# Altium PCB 01.PcbDoc
Units mm, origin at the board's own origin, x right, y up, seen from the top; angles counter-clockwise.
Board outline 90.17 x 91.31 mm, 2 copper layers (Top Layer, Bottom Layer); 65 components, 0 nets, 220 pads, 0 vias.
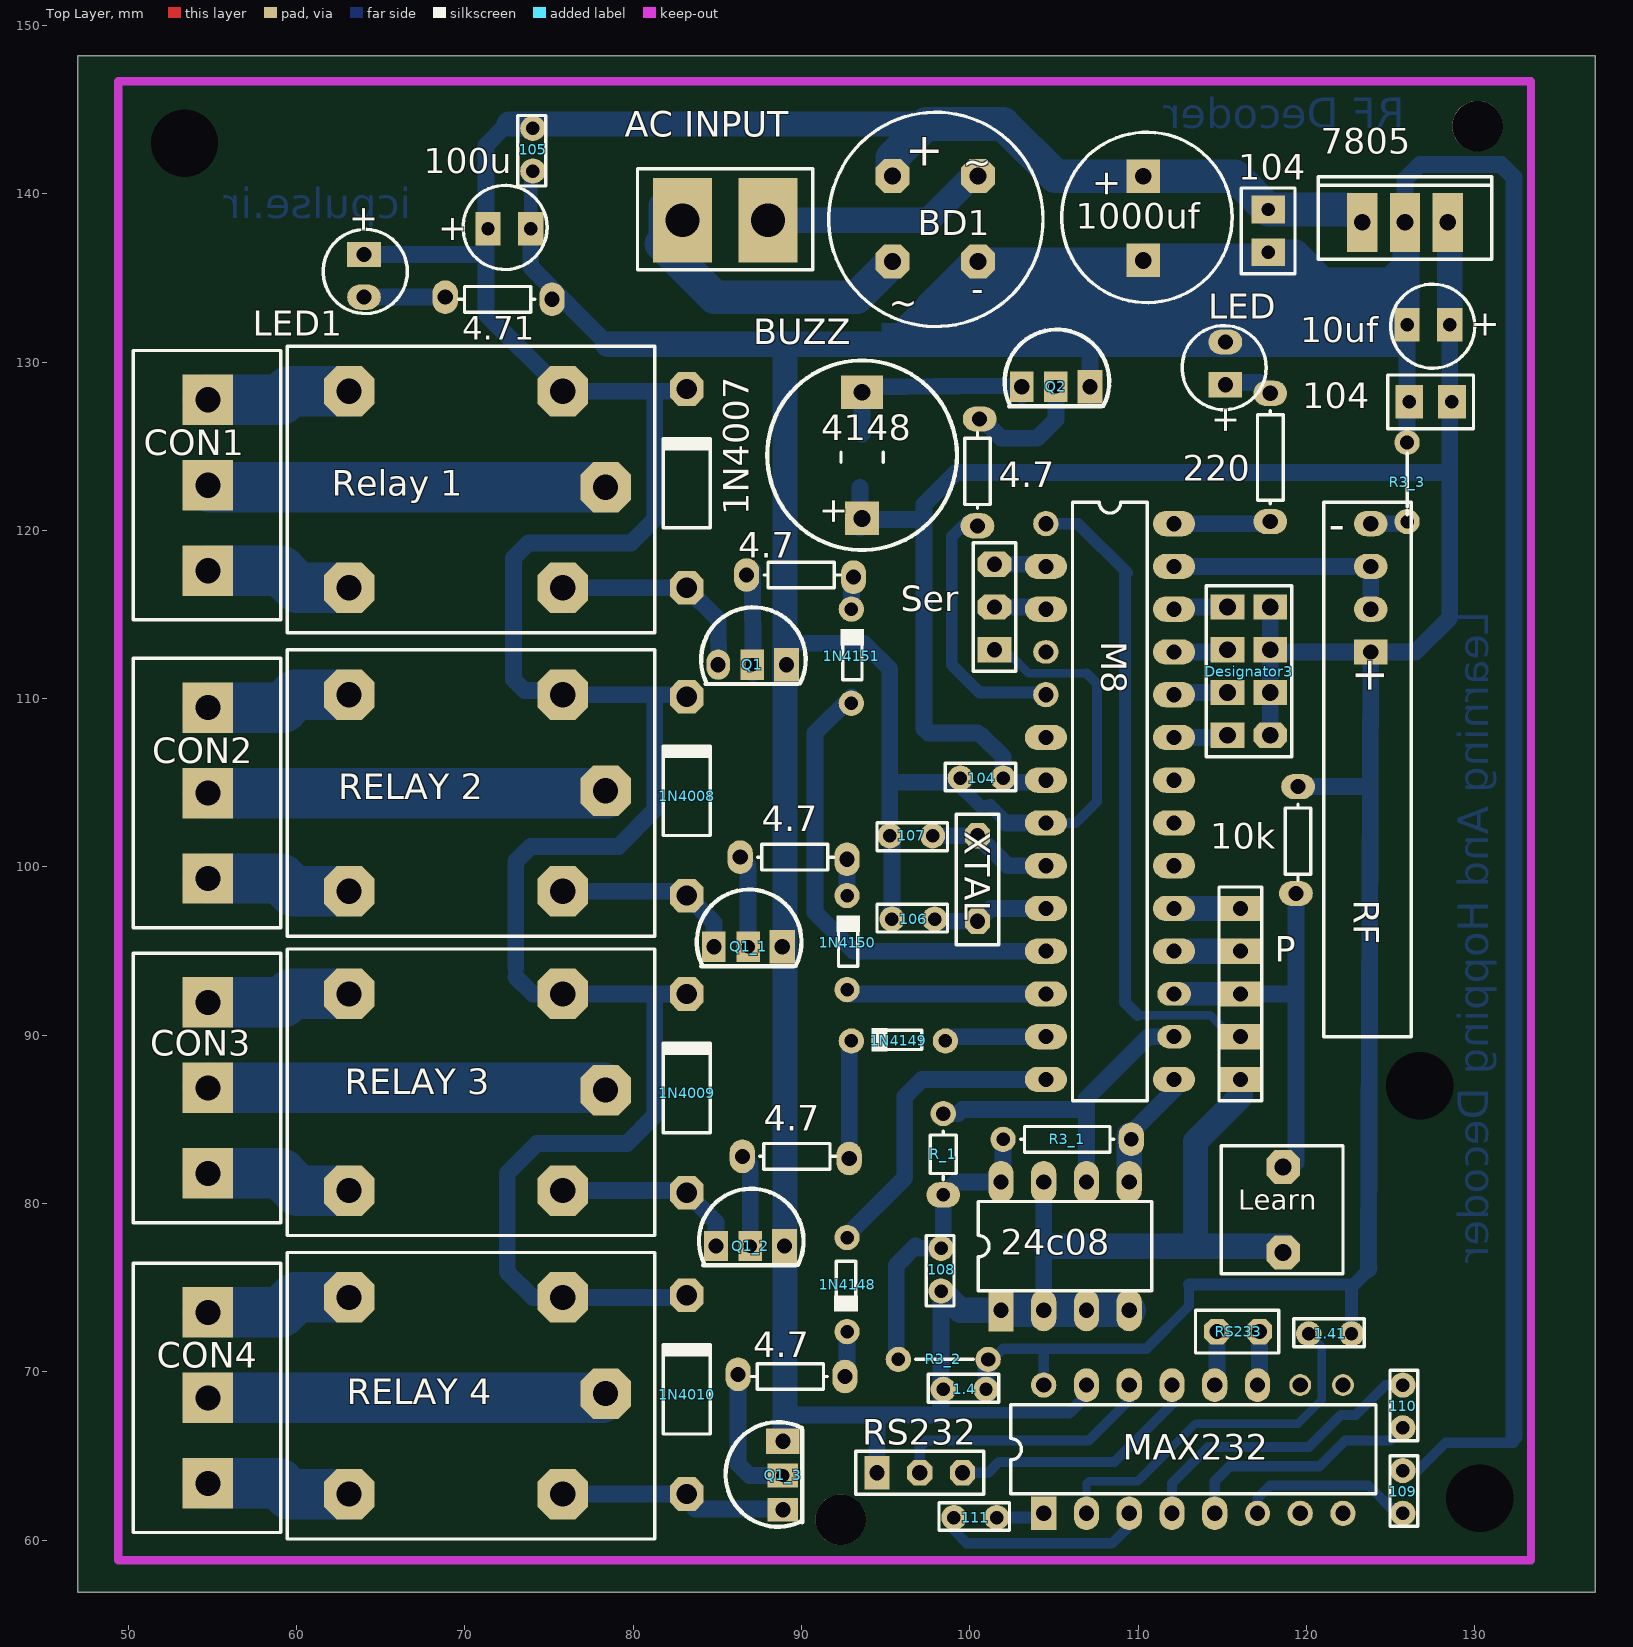
[diagram p0: Top Layer view]
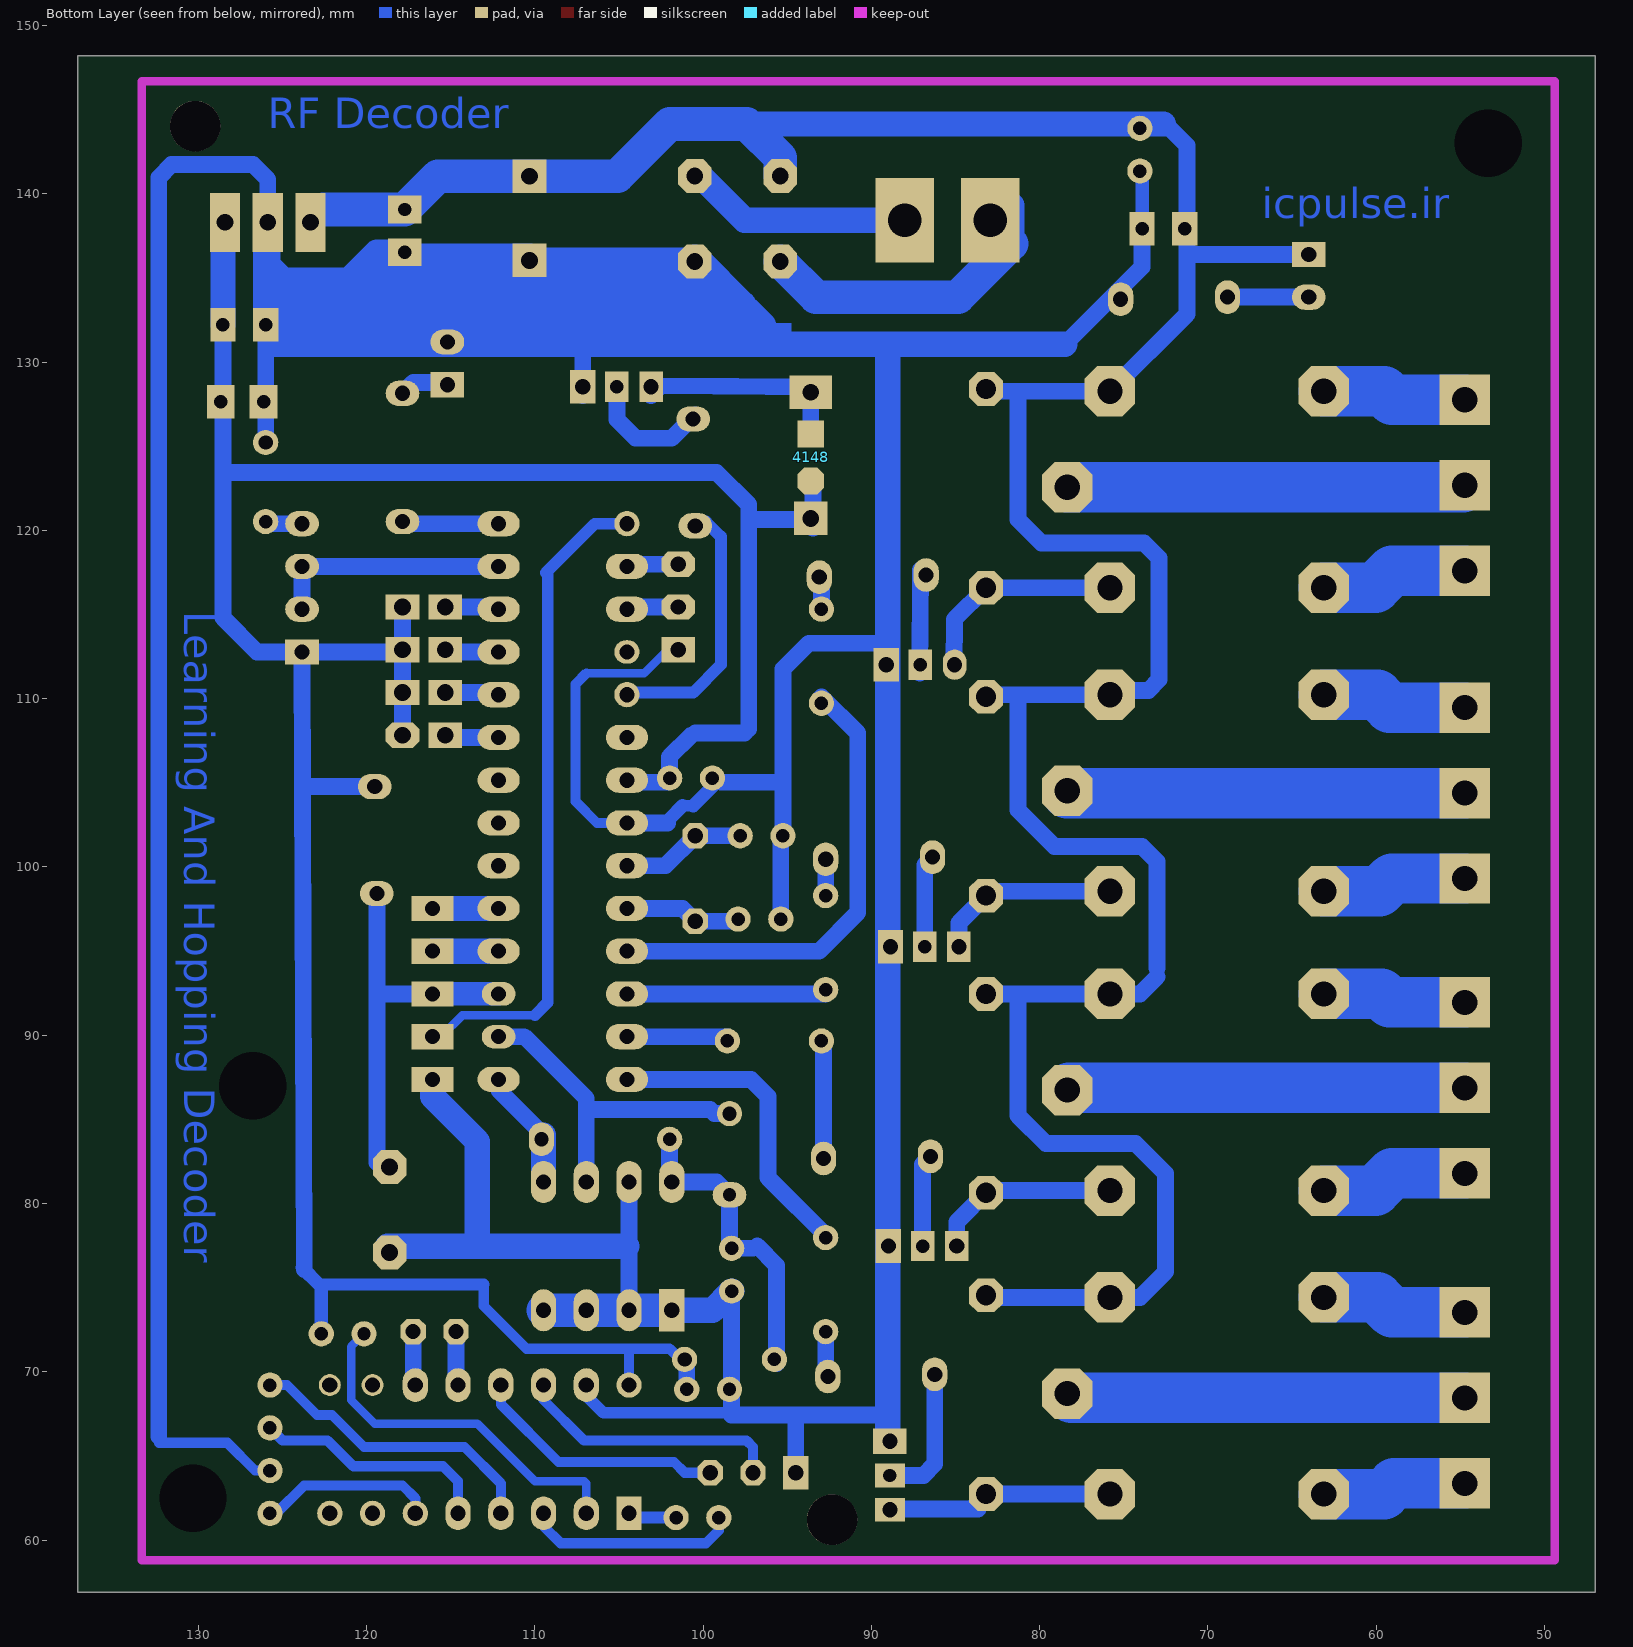
[diagram p1: Bottom Layer view, seen from below]

## Layer stack, top to bottom
Top Solder: solder mask 0.0102, Solder Resist, Dk 3.5
Top Layer: signal copper 0.0356
Dielectric1: dielectric 0.32, FR-4, Dk 4.8
Bottom Layer: signal copper 0.0356
Bottom Solder: solder mask 0.0102, Solder Resist, Dk 3.5

## Board outline
47.498,148.209 137.16,148.209 137.16,56.896 46.99,56.896 46.99,148.209

## Design rules (kind name [scope] priority, off if disabled: settings)
Clearance [All] p1: gap=0.254 ignorepadtopadclearanceinfootprint=FALSE except(0: Arc-Hole Track-Hole SMDPad-Hole THPad-Hole Via-Hole Fill-Hole Poly-Hole Region-Hole Text-Hole)
FabricationTestPointUsage TestPointUsage [All] p1: valid=0 allowmultiple=FALSE
FabricationTestpoint Testpoint [All] p1: side=3 testpointundercomponent=TRUE minsize=1.016 maxsize=2.54 preferedsize=1.524 minholesize=0 maxholesize=1.016 preferedholesize=0.813 testpointgrid=0.025 allowsidetop=TRUE allowsidebottom=TRUE usegrid=TRUE gridtolerance=0
PolygonConnect [All] p1: connectstyle=Relief reliefconductorwidth=0.254 reliefentries=4 polygonreliefangle="90 Angle" airgapwidth=0.254
RoutingVias [All] p1: holewidth=0.711 width=1.27 viastyle="Through Hole" minholewidth=0.711 minwidth=1.27 maxholewidth=0.711 maxwidth=1.27
SolderMaskExpansion [All] p1: expansion=0.102
Width [All] p1: maxlimit=0.254 minlimit=0.254 preferedwidth=0.254
28 further rules are at their usual default settings.

## Components (designator, comment, footprint, x,y, rotation, side; value= is the part's Value field where it differs from the comment)
1.4 "104" VP32-3.2#1 99.695,68.961 r180 top (schematic designator C7)
1.41 "104" VP32-3.2#1 121.412,72.263 r180 top (schematic designator C7)
1N4007 "Comment" DO-41#1 83.185,122.809 r90 top
1N4008 "Comment" DO-41#1 83.185,104.521 r90 top
1N4009 "Comment" DO-41#1 83.185,86.868 r90 top
1N4010 "Comment" DO-41#1 83.185,68.961 r90 top
1N4148 "Comment" DO-41#2 92.71,76.327 r270 top
1N4149 "Comment" DO-41#2 96.901,89.662 r180 top
1N4150 "Comment" DO-41#2 92.71,94.361 r90 top
1N4151 "Comment" DO-41#2 92.964,111.379 r90 top
4.7 "Comment" AXIAL-0.3#1 100.457,124.079 r270 top
4.7 "Comment" AXIAL-0.3#1 88.773,69.723 r0 top
4.7 "Comment" AXIAL-0.3#1 90.297,82.804 r180 top
4.7 "Comment" AXIAL-0.3#1 90.17,100.584 r180 top
4.7 "Comment" AXIAL-0.3#1 90.551,117.348 r180 top
4.71 "Comment" AXIAL-0.3#1 71.374,133.731 r0 top
10k "Comment" AXIAL-0.3#1 119.507,100.965 r90 top
10uf "100uF" cap02#1 118.364,127.127 r270 top (schematic designator C5)
24c08 "Comment" DIP-8 105.664,77.47 r0 top
100u "100uF" cap02#1 81.534,143.002 r90 top (schematic designator C5)
104 "104" VP32-3.2#1 100.711,105.283 r180 top (schematic designator C7)
104 "22pF" VP32-3.2#2 127.381,127.635 r180 top (schematic designator C7)
104 "22pF" VP32-3.2#2 117.729,137.795 r90 top (schematic designator C7)
105 "104" VP32-3.2#1 74.041,142.621 r270 top (schematic designator C7)
106 "104" VP32-3.2#1 96.647,96.901 r180 top (schematic designator C7)
107 "104" VP32-3.2#1 96.52,101.854 r0 top (schematic designator C7)
108 "104" VP32-3.2#1 98.298,76.073 r270 top (schematic designator C7)
109 "104" VP32-3.2#1 125.73,62.865 r90 top (schematic designator C7)
110 "104" VP32-3.2#1 125.73,67.945 r90 top (schematic designator C7)
111 "104" VP32-3.2#1 100.33,61.341 r180 top (schematic designator C7)
220 "Comment" AXIAL-0.3#2 117.856,124.333 r270 top
1000uf "Comment" CAPPR5-5x5 110.311,138.544 r270 top
4148 "Comment" 3225[1210] 93.599,124.333 r90 top
7805 "Comment" TO-262-AA 125.857,138.303 r0 top
"AC INPUT" "Comment" HDR1X2#1 88.011,138.43 r180 top
BUZZ "Buzzer" Buzzer1 101.219,125.73 r90 top
CON1 "Comment" HDR1X3#1 54.737,117.602 r90 top
CON2 "Comment" HDR1X3#1 54.737,99.314 r90 top
CON3 "Comment" HDR1X3#1 54.737,81.788 r90 top
CON4 "Comment" HDR1X3#1 54.737,63.373 r90 top
Designator3 "Comment" HDR2X5_CEN 117.856,105.283 r90 top
Learn "Comment" HDR1X2#2 118.618,77.089 r90 top
LED "100uF" cap02#2 110.109,138.811 r180 top (schematic designator C5)
LED1 "100uF" cap02#2 69.088,126.238 r0 top (schematic designator C5)
M8 "Comment" 28P3 108.331,103.886 r270 top
MAX232 "Comment" JE16 113.284,65.405 r0 top
P "Comment" HDR1X5 116.078,97.536 r270 top
Q1 "BC546" tr1#1 97.79,101.854 r0 top
Q1_1 "BC546" tr1#2 97.536,85.09 r0 top (schematic designator Q1)
Q1_2 "BC546" tr1#2 97.663,67.31 r0 top (schematic designator Q1)
Q1_3 "BC546" tr1#2 99.06,74.549 r90 top (schematic designator Q1)
Q2 "BC546" tr1#2 115.824,118.364 r0 top (schematic designator Q1)
R3_1 "Comment" AXIAL-0.3#3 105.791,83.82 r0 top
R3_2 "Comment" AXIAL-0.3#4 99.568,70.739 r0 top
R3_3 "Comment" AXIAL-0.3#5 125.984,123.698 r90 top
R_1 "Comment" AXIAL-0.3#6 98.425,81.534 r90 top
"Relay 1" "Comment" HDR2X3_CEN 65.659,123.19 r270 top
"RELAY 2" "Comment" HDR2X3_CEN 65.659,105.156 r270 top
"RELAY 3" "Comment" HDR2X3_CEN 65.659,87.376 r270 top
"RELAY 4" "Comment" HDR2X3_CEN 65.659,69.342 r270 top
RF "Comment" HDR1X4 123.825,112.776 r90 top
RS232 "Comment" HDR1X3#2 94.488,64.008 r0 top
RS233 "Comment" HDR1X3#3 119.761,72.39 r180 top
Ser "Comment" HDR1X3#4 101.473,112.903 r90 top
XTAL "Comment" HDR1X2#3 100.457,101.854 r270 top

## Footprints (in the part's own frame and the unit in brackets; to place one, negate y for a bottom-side part, rotate by r counter-clockwise, add the part's x,y. Pads: shape width x height; smd on the part's side, far side on the other; paste and mask are expansions set on the pad)
28P3 [mm] "DIP; 28 Leads; Row Spacing 7.62 mm; Pitch 2.54 mm"
  round 1.5 hole 0.9: 1(-16.51,-3.81) 5(-6.35,-3.81)
  oval 1.5x2.5 hole 0.9: 2(-13.97,-3.81) 3(-11.43,-3.81) 6(-3.81,-3.81) 7(-1.27,-3.81) 8(1.27,-3.81) 9(3.81,-3.81) 10(6.35,-3.81) 11(8.89,-3.81) 12(11.43,-3.81) 13(13.97,-3.81) 14(16.51,-3.81) 15(16.51,3.81) 18(8.89,3.81) 19(6.35,3.81) 20(3.81,3.81) 21(1.27,3.81) 22(-1.27,3.81) 23(-3.81,3.81) 24(-6.35,3.81) 25(-8.89,3.81) 26(-11.43,3.81) 27(-13.97,3.81) 28(-16.51,3.81)
  oval 1.4x1.5 hole 0.9: 4(-8.89,-3.81)
  oval 1.4x2 hole 0.9: 16(13.97,3.81) 17(11.43,3.81)
  silkscreen extent -17.78,-2.23 17.78,2.23
3225[1210] [mm] "Chip Resistor; Body 3.2 x 2.5 mm (LxW typ)"
  oct 1.6x1.6 smd far side: 1(-1.4,0)
  rect 1.6x1.6 smd far side: 2(1.4,0)
  silkscreen extent -0.3,-1.25 0.3,1.25
AXIAL-0.3#1 [mm] "Resistor; 2 Leads"
  oval 1.5x2 hole 0.9: 1(-2.54,0.127) 2(3.81,0)
  silkscreen extent -1.75,-0.76 2.77,0.76
AXIAL-0.3#2 [mm] "Resistor; 2 Leads"
  oval 1.5x2 hole 0.9: 1(-3.81,0) 2(3.81,0)
  silkscreen extent -2.77,-0.76 2.77,0.76
AXIAL-0.3#3 [mm] "Resistor; 2 Leads"
  round 1.5 hole 0.8: 1(-3.81,0)
  oval 1.5x2 hole 0.85: 2(3.81,0)
  silkscreen extent -2.77,-0.76 2.77,0.76
AXIAL-0.3#4 [mm] "Resistor; 2 Leads"
  round 1.5 hole 0.8: 1(-3.81,0)
  round 1.5 hole 0.85: 2(1.524,0)
  silkscreen extent -2.77,0 0.64,0
AXIAL-0.3#5 [mm] "Resistor; 2 Leads"
  round 1.5 hole 0.8: 1(-3.175,0)
  round 1.5 hole 0.85: 2(1.524,0)
  silkscreen extent -2.77,0 0.89,0
AXIAL-0.3#6 [mm] "Resistor; 2 Leads"
  oval 1.5x2 hole 0.8: 1(-1.016,0)
  round 1.5 hole 0.85: 2(3.81,0)
  silkscreen extent -0.13,-0.76 2.77,0.76
Buzzer1 [mm]
  rect 2x2 hole 1: 1(-5.02,7.62)
  rect 2x2.5 hole 1: 2(2.48,7.62)
  silkscreen extent -6.9,1.98 4.36,13.26
cap02#1 [mm]
  rect 2x1.5 hole 0.8: 1(-5.08,10.16) 2(-5.08,7.62)
  silkscreen extent -7.5,6.65 -2.5,11.64
cap02#2 [mm]
  rect 2x1.5 hole 0.9: 1(-5.08,10.16)
  oval 2x1.5 hole 0.9: 2(-5.08,7.62)
  silkscreen extent -7.5,6.64 -2.51,11.64
CAPPR5-5x5 [mm] "Capacitor, Electrolytic, Radial; Body 5 x 5 mm (Dia.xH typ); Pin Spacing 5 mm (typ)"
  rect 2x2 hole 1: 1(-2.5,0) 2(2.5,0)
DIP-8 [mm] "DIP; 8 Leads; Row Spacing 7.62 mm; Pitch 2.54 mm"
  rect 1.5x2.5 hole 0.9: 1(-3.81,-3.81)
  oval 1.5x2.5 hole 0.9: 2(-1.27,-3.81) 3(1.27,-3.81) 4(3.81,-3.81) 5(3.81,3.81) 6(1.27,3.81) 7(-1.27,3.81) 8(-3.81,3.81)
  silkscreen extent -5.15,-2.65 5.15,2.65
DO-41#1 [mm] "Diode, Axial; Body 5.2 x 2.7 mm (LxDia. max), Lead Dia. 0.86 mm (max)"
  oct 2x2 hole 1.2: 1(-6.223,0) 2(5.588,0)
  silkscreen extent -2.65,-1.4 2.75,1.4
DO-41#2 [mm] "Diode, Axial; Body 5.2 x 2.7 mm (LxDia. max), Lead Dia. 0.86 mm (max)"
  round 1.5 hole 0.8: 1(-1.651,0) 2(3.937,0)
  silkscreen extent -0.25,-0.76 2.75,0.64
HDR1X2#1 [mm] "Connector; Header; 2 Position"
  rect 3.5x5 hole 2: 1(0,0) 2(5.08,0)
  silkscreen extent -2.65,-3.05 7.75,2.95
HDR1X2#2 [mm] "Connector; Header; 2 Position"
  oct 2x2 hole 1: 1(0,0) 2(5.08,0)
  silkscreen extent -1.27,-3.56 6.35,3.68
HDR1X2#3 [mm] "Connector; Header; 2 Position"
  oct 1.5x1.5 hole 0.9: 1(0,0) 2(5.08,0)
  silkscreen extent -1.27,-1.27 6.48,1.27
HDR1X3#1 [mm] "Connector; Header; 3 Position"
  rect 3x3 hole 1.5: 1(0,0) 2(10.16,0) 3(5.08,0)
  silkscreen extent -2.92,-4.32 13.08,4.45
HDR1X3#2 [mm] "Connector; Header; 3 Position"
  rect 1.5x2 hole 0.9: 1(0,0)
  oct 1.5x1.5 hole 0.9: 2(2.54,0) 3(5.08,0)
  silkscreen extent -1.27,-1.27 6.35,1.27
HDR1X3#3 [mm] "Connector; Header; 3 Position"
  oct 1.5x1.5 hole 0.9: 2(2.54,0) 3(5.08,0)
  silkscreen extent 1.4,-1.27 6.35,1.27
HDR1X3#4 [mm] "Connector; Header; 3 Position"
  rect 1.5x2 hole 0.9: 1(0,0)
  oct 1.5x2 hole 0.9: 2(2.54,0) 3(5.08,0)
  silkscreen extent -1.27,-1.27 6.35,1.27
HDR1X4 [mm] "Connector; Header; 4 Position"
  rect 1.5x2 hole 0.9: 1(0,0)
  oval 1.5x2 hole 0.9: 2(2.54,0) 3(5.08,0) 4(7.62,0)
  silkscreen extent -22.86,-2.41 8.89,2.79
HDR1X5 [mm] "Connector; Header; 5 Position"
  rect 1.5x2.5 hole 0.9: 1(0,0) 2(2.54,0) 3(5.08,0) 4(7.62,0) 5(10.16,0)
  silkscreen extent -1.27,-1.27 11.43,1.27
HDR2X3_CEN [mm] "Connector; Header; 3x2 Position"
  oct 3x3 hole 1.5: 1(-5.08,-2.54) 3(6.604,-2.54) 4(-5.08,10.16) 5(0.635,12.7) 6(6.604,10.16)
  silkscreen extent -7.75,-6.22 9.27,15.62
HDR2X5_CEN [mm] "Connector; Header; 5x2 Position"
  oct 1.5x2 hole 1: 2(2.54,0)
  rect 1.5x2 hole 1: 3(5.08,0) 4(7.62,0) 5(10.16,0) 7(2.54,2.54) 8(5.08,2.54) 9(7.62,2.54) 10(10.16,2.54)
  silkscreen extent 1.27,-1.27 11.43,3.81
JE16 [mm] "DIP; 16 Leads; Row Spacing 7.62 mm; Pitch 2.54 mm"
  rect 1.5x2 hole 0.9: 1(-8.89,-3.81)
  oval 1.5x2 hole 0.9: 2(-6.35,-3.81) 3(-3.81,-3.81) 4(-1.27,-3.81) 5(1.27,-3.81) 11(3.81,3.81) 12(1.27,3.81) 13(-1.27,3.81) 14(-3.81,3.81) 15(-6.35,3.81)
  round 1.5 hole 0.9: 6(3.81,-3.81) 7(6.35,-3.81) 8(8.89,-3.81) 16(-8.89,3.81)
  round 1.3 hole 0.9: 9(8.89,3.81) 10(6.35,3.81)
  silkscreen extent -10.85,-2.65 10.85,2.65
TO-262-AA [mm] "TO, Thru-Hole, Vertical, Heatsink Mounted; 3 In-Line Leads; Pitch 2.54 mm"
  rect 1.8x3.5 hole 1: 1(-2.54,0) 2(0,0) 3(2.54,0)
  silkscreen extent -5.15,-2.2 5.15,2.7
tr1#1 [mm]
  rect 1.5x2 hole 0.9: 1(-8.675,10.165)
  rect 1.4x1.8 hole 0.8: 2(-10.707,10.165)
  oval 1.4x1.8 hole 0.9: 3(-12.739,10.165)
  silkscreen extent -13.75,9.02 -7.54,13.57
tr1#2 [mm]
  rect 1.5x2 hole 0.9: 1(-8.675,10.165)
  rect 1.4x1.8 hole 0.8: 2(-10.707,10.165)
  rect 1.4x1.8 hole 0.9: 3(-12.739,10.165)
  silkscreen extent -13.75,9.02 -7.54,13.57
VP32-3.2#1 [mm] "Capacitor, Ceramic, Thru-Hole, Dipped Radial; Body 5.1 x 3.2 mm (WxT) Pin Spacing 2.54 mm (typ)"
  round 1.5 hole 0.8: 1(-1.27,0) 2(1.27,0)
  silkscreen extent -2.03,-0.89 2.16,0.76
VP32-3.2#2 [mm] "Capacitor, Ceramic, Thru-Hole, Dipped Radial; Body 5.1 x 3.2 mm (WxT) Pin Spacing 2.54 mm (typ)"
  rect 1.65x2 hole 0.8: 1(-1.27,0) 2(1.27,0)
  silkscreen extent -2.55,-1.6 2.55,1.6

## Part data
1.4 1.41 104 104 104 105 106 107 108 109 110 111: library part Cap, "Capacitor"
4.7 4.7 4.7 4.7 4.7 4.71 10k 24c08 220 7805 M8 P R3_1 R3_2 R3_3 R_1 RF: library part COAX-M
10uf 100u LED LED1: library part "Cap Pol1", "Polarized Capacitor (Radial)"
1000uf: library part "Header 8"
4148: library part "Tube 12AX7"
"AC INPUT": library part MAX7219CNG
BUZZ: "Magnetic Transducer Buzzer"
Designator3: library part MHDR2X5
Q1 Q1_1 Q1_2 Q1_3 Q2: library part 2N3904, "NPN General Purpose Amplifier"
RS232 RS233 Ser: library part "Header 3"

## Free pads (board coordinates)
  oct 2x2 hole 1: 1(95.411,141.053) 2(100.486,141.053) 3(100.486,135.978) 4(95.411,135.978)
  round 3 hole 4: 4(53.34,143.002) 7(126.746,86.995) 7(130.302,62.484)
  round 3 hole 3: 7(92.329,61.214) 7(130.175,144.018)

## Nets (pads, with @x,y where several pads share a name; then routed paths per layer and width w, separated by ;. In a path a pad name is that pad's centre, name@x,y a point inside that pad or via, vN(x,y) a via of type N, cw(c..) or ccw(c..) an arc to the next point about the centre after c; other vN are vias at no path point)
pads on no net: 1.4.1 1.4.2 1.41.1 1.41.2 1N4007.1 1N4007.2 1N4008.1 1N4008.2 1N4009.1 1N4009.2 1N4010.1 1N4010.2 1N4148.1 1N4148.2 1N4149.1 1N4149.2 1N4150.1 1N4150.2 1N4151.1 1N4151.2 4.7.1 4.7.2 4.71.1 4.71.2 10k.1 10k.2 10uf.1 10uf.2 24c08.1 24c08.2 24c08.3 24c08.4 24c08.5 24c08.6 24c08.7 24c08.8 100u.1 100u.2 104.1 104.2 105.1 105.2 106.1 106.2 107.1 107.2 108.1 108.2 109.1 109.2 110.1 110.2 111.1 111.2 220.1 220.2 1000uf.1 1000uf.2 4148.1 4148.2 7805.1 7805.2 7805.3 "AC INPUT.1" "AC INPUT.2" "Relay 1.1" "Relay 1.3" "Relay 1.4" "Relay 1.5" "Relay 1.6" "RELAY 2.1" "RELAY 2.3" "RELAY 2.4" "RELAY 2.5" "RELAY 2.6" "RELAY 3.1" "RELAY 3.3" "RELAY 3.4" "RELAY 3.5" "RELAY 3.6" "RELAY 4.1" "RELAY 4.3" "RELAY 4.4" "RELAY 4.5" "RELAY 4.6" BUZZ.1 BUZZ.2 CON1.1 CON1.2 CON1.3 CON2.1 CON2.2 CON2.3 CON3.1 CON3.2 CON3.3 CON4.1 CON4.2 CON4.3 Designator3.2 Designator3.3 Designator3.4 Designator3.5 Designator3.7 Designator3.8 Designator3.9 Designator3.10 Learn.1 Learn.2 LED1.1 LED1.2 LED.1 LED.2 M8.1 M8.2 M8.3 M8.4 M8.5 M8.6 M8.7 M8.8 M8.9 M8.10 M8.11 M8.12 M8.13 M8.14 M8.15 M8.16 M8.17 M8.18 M8.19 M8.20 M8.21 M8.22 M8.23 M8.24 M8.25 M8.26 M8.27 M8.28 MAX232.1 MAX232.2 MAX232.3 MAX232.4 MAX232.5 MAX232.6 MAX232.7 MAX232.8 MAX232.9 MAX232.10 MAX232.11 MAX232.12 MAX232.13 MAX232.14 MAX232.15 MAX232.16 P.1 P.2 P.3 P.4 P.5 Q1.1 Q1.2 Q1.3 Q1_1.1 Q1_1.2 Q1_1.3 Q1_2.1 Q1_2.2 Q1_2.3 Q1_3.1 Q1_3.2 Q1_3.3 Q2.1 Q2.2 Q2.3 R3_1.1 R3_1.2 R3_2.1 R3_2.2 R3_3.1 R3_3.2 R_1.1 R_1.2 RF.1 RF.2 RF.3 RF.4 RS232.1 RS232.2 RS232.3 RS233.2 RS233.3 Ser.1 Ser.2 Ser.3 XTAL.1 XTAL.2
copper on no net: | length 1429.8
  Bottom Layer w0.254: 54.737,122.682 54.864,122.555 ; 71.12,136.398 71.247,136.271 ; 72.39,144.018 72.39,144.399 ; 73.025,93.472 73.025,93.98 ; 75.565,110.49 75.819,110.236 ; 78.105,68.453 78.359,68.707 ; 78.232,86.868 78.359,86.741 ; 78.359,104.394 78.486,104.267 ; 83.058,74.422 83.185,74.549 ; 83.058,80.772 83.185,80.645 ; 83.185,62.738 83.312,62.611 ; 86.868,139.827 88.265,138.43 ; 92.583,69.723 92.71,69.85 ; 93.472,120.777 93.599,120.65 ; 93.599,119.888 93.599,120.71 ; 95.152,136.173 95.25,136.271 ; 95.25,101.854 95.25,103.124 ; 95.352,135.919 95.411,135.978 ; 95.411,140.936 95.411,141.053 ; 95.841,141.053 95.411,141.053 ; 96.183,141.053 95.411,141.053 ; 97.282,108.204 97.536,107.95 ; 97.79,67.691 97.917,67.564 ; 97.917,96.901 98.044,96.774 ; 98.298,77.343 98.425,77.47 ; 98.679,77.089 98.679,78.105 ; 98.933,105.029 99.187,105.029 ; 99.314,85.344 99.568,85.598 ; 100.159,141.053 100.486,141.053 100.413,141.053 ; 100.203,135.695 100.486,135.978 100.486,135.792 ; 100.965,70.485 101.092,70.485 ; 101.219,117.983 101.346,117.856 ; 101.473,112.903 102.108,112.903 ; 101.6,105.029 102.362,105.029 ; 101.854,81.28 101.981,81.407 ; 104.14,108.077 104.521,107.696 ; 104.394,71.247 104.521,71.374 ; 104.394,77.343 104.521,77.47 ; 104.394,92.329 104.521,92.456 ; 106.934,63.373 107.061,63.5 ; 106.934,68.58 106.934,69.215 ; 107.061,131.699 107.149,131.611 ; 107.569,135.665 107.696,135.792 ; 109.474,60.833 109.474,61.595 ; 109.474,68.326 109.474,69.215 ; 110.059,135.792 110.311,136.044 ; 110.275,136.359 110.363,136.271 ; 112.141,86.741 112.141,87.376 ; 115.189,89.916 116.078,89.916 115.57,89.916 ; 116.205,135.917 116.332,136.044 ; 117.575,136.044 117.729,136.198 117.729,136.525 ; 117.729,120.396 117.856,120.523 ; 117.856,112.522 118.11,112.776 ; 122.555,139.065 123.317,138.303 ; 122.682,75.057 122.809,75.184 ; 123.698,104.775 123.825,104.902 ; 125.349,61.595 125.73,61.595 ; 128.397,138.303 128.524,138.176 ; 128.524,127.635 128.651,127.508
  Bottom Layer w0.5: 102.108,112.903 103.505,111.506 106.934,111.506 ; 106.934,61.595 106.934,63.373 ; 107.061,63.5 109.982,63.5 113.411,66.929 119.507,66.929 120.904,68.326 120.904,71.501 120.142,72.263 ; 109.982,91.186 114.3,91.186 115.57,89.916
  Bottom Layer w0.6: 97.028,64.008 97.028,65.532 97.409,65.913 107.061,65.913 109.474,68.326 ; 99.06,61.341 99.06,60.579 99.822,59.817 108.458,59.817 109.474,60.833 ; 99.568,64.008 101.092,64.008 101.727,64.643 108.585,64.643 112.014,68.072 112.014,69.215 ; 101.092,70.485 101.981,71.374 110.49,71.374 113.03,73.914 113.03,75.184 ; 104.394,69.215 104.394,71.247 ; 104.521,102.616 106.299,102.616 107.569,103.886 107.569,110.871 106.934,111.506 ; 112.014,61.595 112.014,63.373 114.173,65.532 115.824,65.532 120.142,65.532 122.047,67.437 122.936,67.437 124.714,69.215 125.73,69.215 ; 114.554,61.595 114.554,63.5 115.443,64.389 117.856,64.389 120.777,64.389 122.301,65.913 124.968,65.913 125.73,66.675 ; 117.094,61.595 117.094,62.484 117.856,63.246 123.698,63.246 125.349,61.595 ; 125.73,64.135 126.619,64.135 128.27,65.786 132.334,65.786
  Bottom Layer w0.7: 97.917,67.564 105.918,67.564 106.934,68.58 ; 99.822,120.523 98.933,119.634 98.933,112.014 100.584,110.363 104.648,110.363 ; 100.584,103.632 101.219,103.632 ; 101.6,61.341 104.394,61.341 ; 104.521,120.396 106.426,120.396 109.347,117.475 ; 109.22,117.602 109.22,91.948 109.982,91.186 ; 113.03,75.184 122.809,75.184
  Bottom Layer w0.8: 73.914,137.922 73.914,141.224 ; 99.187,105.029 100.584,103.632 ; 101.219,103.632 101.981,102.87 ; 122.682,72.263 122.682,75.057 ; 122.809,75.184 123.825,76.2
  Bottom Layer w1: 64.008,133.858 68.834,133.858 ; 64.008,136.398 71.12,136.398 ; 72.39,144.018 71.247,142.875 71.247,132.842 75.819,128.27 83.058,128.27 ; 73.025,93.472 74.041,92.456 75.819,92.456 83.185,92.456 ; 73.025,93.98 73.025,100.33 73.914,101.219 79.121,101.219 81.28,103.378 81.28,110.236 ; 73.914,137.922 73.914,135.636 78.486,131.064 ; 75.565,110.49 73.533,110.49 72.898,111.125 72.898,118.364 73.787,119.253 79.883,119.253 81.28,120.65 81.28,128.27 ; 75.819,62.738 83.185,62.738 ; 75.819,80.772 83.058,80.772 84.924,78.906 84.924,77.475 ; 75.819,98.552 82.931,98.552 84.797,96.686 84.797,95.255 ; 75.819,110.236 83.058,110.236 ; 75.819,116.586 83.185,116.586 85.051,114.72 85.09,111.887 ; 81.28,92.456 81.28,85.217 79.629,83.566 74.295,83.566 72.517,81.788 72.517,75.946 74.041,74.422 75.819,74.422 83.058,74.422 ; 82.931,62.992 83.82,62.103 ; 83.659,61.849 88.519,61.849 ; 86.233,69.85 86.233,64.516 86.907,63.842 88.895,63.842 ; 86.36,100.584 86.829,100.115 86.829,95.255 ; 86.487,82.804 86.956,82.335 86.956,77.475 ; 87.083,117.641 87.122,111.506 ; 89.115,113.289 93.721,113.289 95.25,111.76 95.25,101.854 ; 89.662,67.437 98.298,67.437 98.298,74.803 ; 92.583,77.978 96.139,81.534 96.139,86.36 97.155,87.376 104.521,87.376 ; 92.71,69.85 92.71,72.39 ; 92.71,92.456 104.521,92.456 ; 92.71,98.298 92.71,100.457 ; 92.837,82.677 92.837,89.789 ; 92.964,110.109 90.805,107.95 90.805,97.282 93.091,94.996 94.742,94.996 104.521,94.996 ; 92.964,115.697 92.964,117.475 ; 93.218,128.524 102.515,128.591 103.085,128.021 ; 93.472,120.145 93.472,122.555 ; 93.599,120.65 97.282,120.65 ; 93.599,125.733 93.599,128.083 ; 94.488,63.881 94.488,67.437 ; 95.25,105.029 98.933,105.029 ; 95.377,96.901 95.377,101.727 ; 95.631,70.485 95.631,76.327 96.774,77.47 ; 97.028,77.343 98.298,77.343 ; 97.282,108.204 97.282,114.3 ; 97.282,111.633 97.282,116.205 ; 97.282,115.951 97.282,121.539 99.187,123.444 104.14,123.444 105.283,123.444 128.524,123.444 ; 97.536,107.95 100.457,107.95 ; 97.79,101.854 100.457,101.854 102.235,100.076 104.521,100.076 ; 98.044,96.774 100.457,96.774 101.219,97.536 104.521,97.536 ; 98.425,77.47 98.425,80.518 99.187,81.28 101.854,81.28 ; 98.425,85.344 99.314,85.344 ; 98.552,89.916 104.521,89.916 ; 99.568,85.598 106.934,85.598 ; 100.457,126.873 101.854,125.476 104.013,125.476 105.117,126.58 105.117,128.021 ; 100.711,107.823 101.981,106.553 101.981,105.283 ; 100.965,68.961 100.965,70.612 ; 101.092,115.443 104.521,115.443 ; 101.346,117.983 104.775,117.983 ; 101.981,81.407 101.981,83.82 ; 102.108,102.616 104.521,102.616 ; 102.108,105.029 104.648,105.029 ; 104.394,73.66 104.394,81.28 ; 106.934,81.28 106.934,86.233 110.617,89.916 112.141,89.916 ; 107.149,128.021 107.149,131.611 ; 109.474,84.074 112.141,86.741 ; 111.887,110.363 115.316,110.363 ; 111.887,117.856 123.825,117.856 123.825,115.189 ; 112.141,115.443 115.57,115.443 ; 112.141,120.396 117.729,120.396 ; 112.268,107.696 115.697,107.696 ; 112.268,112.776 115.697,112.776 ; 114.681,69.215 114.681,72.39 ; 115.062,128.778 117.221,128.778 117.856,128.143 ; 116.078,92.456 119.126,92.456 ; 117.221,69.215 117.221,72.263 ; 117.856,107.823 117.856,115.443 ; 118.11,112.776 123.825,112.776 ; 119.38,82.423 119.38,98.425 ; 119.507,104.775 123.698,104.775 ; 123.698,76.073 123.825,112.776 ; 123.825,120.396 125.857,120.396 ; 125.857,138.303 125.857,140.843 126.746,141.732 131.572,141.732 132.334,140.97 132.334,66.167 ; 125.984,125.222 125.984,132.207 ; 128.524,125.73 128.524,127.254 128.524,114.808 126.492,112.776 123.825,112.776 ; 128.524,127.508 128.524,132.207
  Bottom Layer w1.4: 112.141,92.456 116.078,92.456
  Bottom Layer w1.5: 72.644,144.145 98.298,144.145 ; 78.486,131.064 95.631,131.064 96.647,132.08 ; 81.661,137.033 81.661,139.319 ; 88.265,138.43 97.536,138.43 100.159,141.053 ; 89.027,66.04 89.027,131.064 ; 98.298,74.803 99.441,73.66 101.854,73.66 ; 104.521,77.47 118.745,77.47 ; 109.474,81.28 109.474,84.074 ; 112.141,94.996 116.078,94.996 ; 112.141,97.536 116.078,97.536 ; 113.411,77.597 113.411,83.693 116.078,86.36 116.078,87.376 ; 117.729,136.525 119.38,136.525 121.031,134.874 124.968,134.874 125.857,135.763 125.857,138.303 ; 125.984,132.207 125.984,136.652 ; 128.524,132.207 128.524,138.176
  Bottom Layer w2: 81.661,137.033 84.836,133.858 93.291,133.858 95.411,135.978 ; 95.411,141.053 95.411,142.147 97.409,144.145 101.981,144.145 105.082,141.044 115.749,141.044 117.729,139.065 122.555,139.065 ; 96.647,132.08 97.536,132.969 ; 97.79,133.282 100.486,135.978 ; 100.486,135.792 110.059,135.792 ; 101.854,73.66 109.474,73.66 ; 110.311,136.044 117.575,136.044
  Bottom Layer w3: 54.737,63.373 58.928,63.373 59.563,62.738 63.119,62.738 ; 54.737,68.453 78.105,68.453 ; 54.737,73.533 59.055,73.533 59.944,74.422 63.119,74.422 ; 54.737,81.788 59.055,81.788 60.071,80.772 63.119,80.772 ; 54.737,86.868 78.232,86.868 ; 54.737,91.948 59.182,91.948 59.69,92.456 63.119,92.456 ; 54.737,99.314 59.055,99.314 59.817,98.552 63.119,98.552 ; 54.737,104.394 78.359,104.394 ; 54.737,109.474 59.182,109.474 59.944,110.236 63.119,110.236 ; 54.737,117.602 59.055,117.602 60.071,116.586 63.119,116.586 ; 54.737,127.762 59.055,127.762 59.563,128.27 63.119,128.27 ; 54.864,122.555 78.359,122.555

## Keep-outs
Keep-Out Layer:
  lines w0.5: 49.403,58.801 49.403,146.685 133.35,146.685 133.35,58.801 49.403,58.801

## Other copper
Bottom Layer:
  rectangle: 98.679,130.302 125.984,135.255
  rectangle: 114.3,134.747 120.142,136.652
  rectangle: 96.647,130.302 99.822,133.096
  rectangle: 94.742,130.302 99.314,132.334
  text "RF Decoder" at 125.857,143.891 h1.8
  text "icpulse.ir" at 66.802,138.557 h1.8
  text "Learning And Hopping Decoder" at 130.81,115.189 h1.8 r90

## Silkscreen, mask and mechanical layers (free items; w line width, h text height)
Top Overlay:
  circle w0.2: c110.526,138.594 r5.065
  circle w0.2: c97.986,138.478 r6.366
  text "+" at 96.161,141.678 h2
  text "~" at 99.586,141.153 h1.5
  text "BD1" at 96.901,137.541 h1.5
  text "-" at 100.086,133.603 h1.5
  text "~" at 95.186,132.803 h1.5
  text "-" at 122.301,119.38 h2
  text "+" at 122.936,110.236 h2 r270

## Text inside footprints (layer, text, board x,y; h text height)
10uf: Top Overlay "+" at 131.483,132.881 h1.5 r180
100u: Top Overlay "+" at 68.415,137.248 h1.5
1000uf: Top Overlay "+" at 107.486,141.444 h1.5 r270
BUZZ: Top Overlay "+" at 92.583,120.269 h1.5 r90
LED: Top Overlay "+" at 115.863,125.692 h1.5 r90
LED1: Top Overlay "+" at 63.334,139.357 h1.5 r270